# Altium PCB PMP30528_RevA.PcbDoc (part 2 of 3)
Units mil, origin at the board's own origin, x right, y up, seen from the top; angles counter-clockwise.
Board outline 2735.03 x 1328.78 mil, 2 copper layers (Top Layer, Bottom Layer), stack 62 mil thick; 91 components, 42 nets, 252 pads, 63 vias.
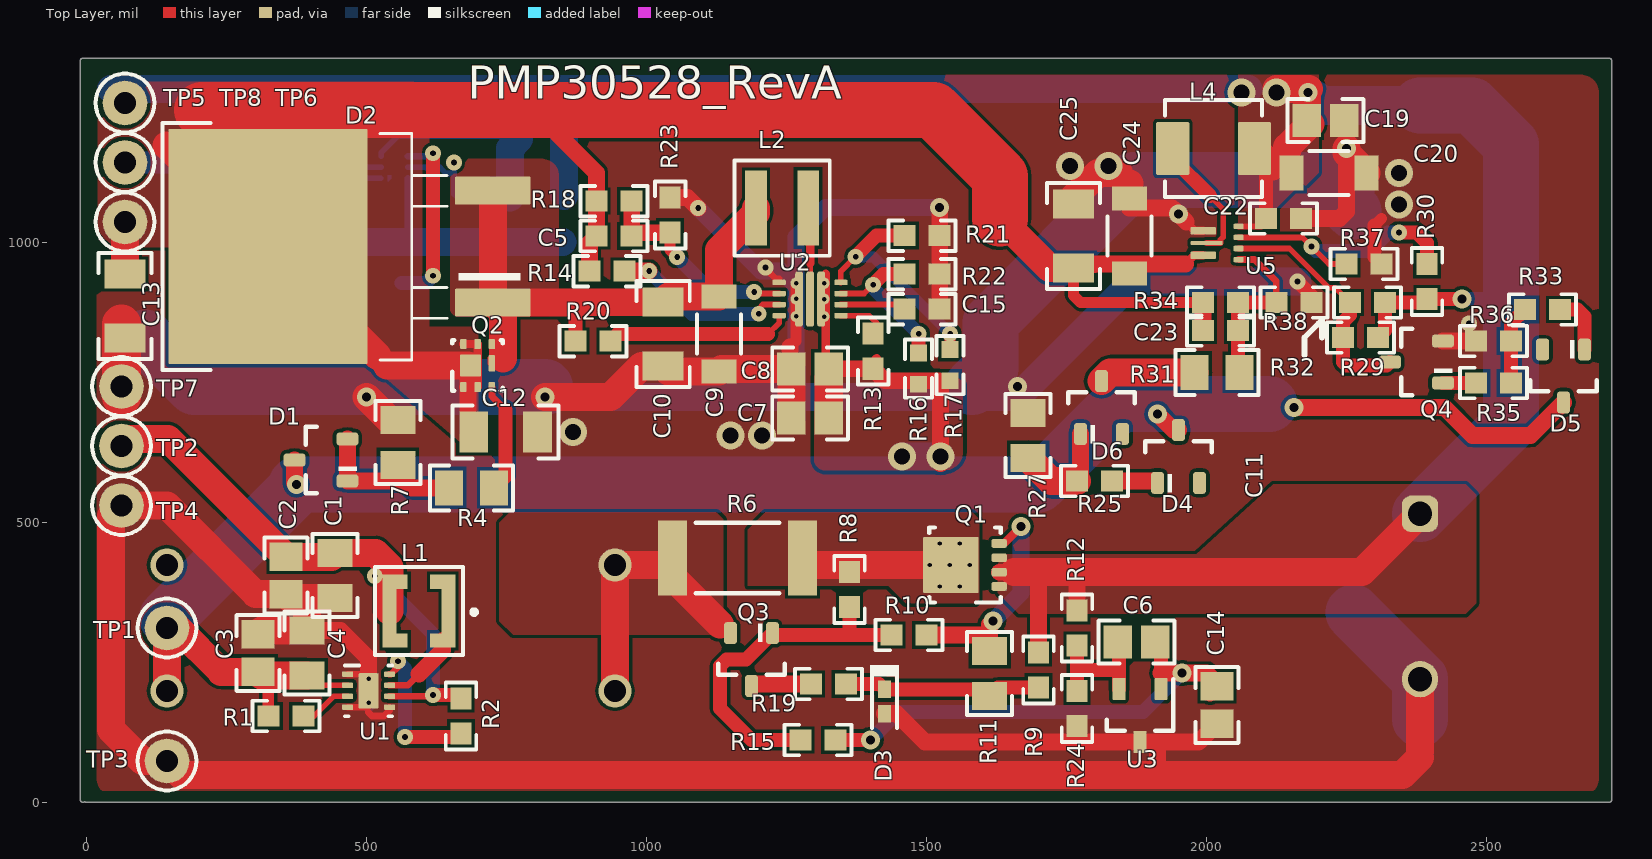
[diagram p0: Top Layer view]

## Part data (continued)
R5: library part PNP300JR-73-47R, "RES, 3 W, 3W Axial resistor", Manufacturer="Yageo America", Power_W=3, Supplier Part Number 1=47AECT-ND, TempCo="300 ppm/C", Tolerance_%=5, Value1=5%, Value2=3W, Value_Code=47R0, ValueDisplayed=47, AEC Category=Q200, AEC Qualified=?, ComponentLink1Description="Datasheet link", ComponentLink1URL=http://www.yageo.com/documents/recent/High%20Power%20Type_PNP.pdf, CompType=Resistor, EIA_Code=E24, LatestRevisionDate=2017-05-10, MountType=TH, PackageReference="3W Axial resistor", PartNumber=DNP, Published=2013-01-08, Publisher="Texas Instruments", Res_ohm=47, RoHS=Y, Supplier 1=Digi-Key, SymbolVersion=2009-05-29, Technology="Metal Element", U/M=EA
R6: "RES, 2.0, 5%, 1 W, AEC-Q200 Grade 0, 2512", Manufacturer=Vishay-Dale, Power_W=1, Supplier Part Number 1=541-2.0XCT-ND, TempCo="200 ppm/C", Tolerance_%=5, Value1=5%, Value2=1W, Value_Code=2R00, ValueDisplayed=2.0, AEC Category=Q200, AEC Grade=0, AEC Qualified=Y, ComponentLink1Description="Datasheet link", ComponentLink1URL=http://www.vishay.com/doc?20035, CompType=Resistor, EIA_Code=E24, LatestRevisionDate=2017-06-11, MountType=SMT, PackageReference=2512, PartNumber=CRCW25122R00JNEG, Published=2008-06-26, Publisher="Texas Instruments", Res_ohm=2, RoHS=Y, SizeArea_mm2=20.16, SizeX_mm=6.3, SizeY_mm=3.2, SizeZ_mm=0.71, Supplier 1=Digi-Key, SymbolVersion=2009-05-29, Technology="Thick Film", U/M=EA, VDC_V=500
R7 R27 R31: "RES, 49.9 k, 1%, 0.125 W, 0805", Manufacturer=Vishay-Dale, Power_W=0.125, Supplier Part Number 1=541-49.9KCCT-ND, TempCo="100 ppm/C", Tolerance_%=1, Value1=1%, Value2=0.125W, Value_Code=49k9, ValueDisplayed=49.9k, AEC Category=Q200, AEC Qualified=?, ComponentLink1Description="Datasheet link", ComponentLink1URL=http://www.vishay.com/docs/20035/dcrcwe3.pdf, CompType=Resistor, EIA_Code=E96, Green_EU RoHS="Passed with Exemption", Green_EU RoHS-2=Passed, Green_Lifecycle=Active, Green_REACh=Passed, LatestRevisionDate=2017-06-23, MountType=SMT, PackageReference=0805, PartNumber=CRCW080549K9FKEA, Published=2008-06-26, Publisher="Texas Instruments", Res_ohm=49900, RoHS=Y, SizeArea_mm2=2.5, SizeX_mm=2, SizeY_mm=1.25, SizeZ_mm=1.45, Supplier 1=Digi-Key, Supplier 2=Newark, Supplier 3=Mouser, Supplier Part Number 2=53K0291, Supplier Part Number 3=71-CRCW0805-49.9K-E3, SymbolVersion=2009-05-29, Technology="Thick Film", U/M=EA, VDC_V=150
R8 R12: "RES, 200, 1%, 0.1 W, 0603", Manufacturer=Vishay-Dale, Power_W=0.1, Supplier Part Number 1=541-200HCT-ND, TempCo="100 ppm/C", Tolerance_%=1, Value1=1%, Value2=0.1W, Value_Code=200R, ValueDisplayed=200, AEC Category=Q200, AEC Qualified=?, ComponentLink1Description="Datasheet link", ComponentLink1URL=http://www.vishay.com/docs/20035/dcrcwe3.pdf, CompType=Resistor, EIA_Code=E96, Green_EU RoHS="Passed with Exemption", Green_EU RoHS-2=Passed, Green_Lifecycle=Active, Green_REACh=Passed, LatestRevisionDate=2017-06-13, MountType=SMT, PackageReference=0603, PartNumber=CRCW0603200RFKEA, Published=2008-06-26, Publisher="Texas Instruments", Res_ohm=200, RoHS=Y, SizeArea_mm2=1.28, SizeX_mm=1.6, SizeY_mm=0.8, SizeZ_mm=1, Supplier 1=Digi-Key, Supplier 2=Newark, Supplier 3=Mouser, Supplier Part Number 2=52K8273, Supplier Part Number 3=71-CRCW0603-200-E3, SymbolVersion=2009-05-29, Technology="Thick Film", U/M=EA, VDC_V=75
R9 R24: "RES, 10.0 k, 1%, 0.1 W, 0603", Manufacturer=Vishay-Dale, Power_W=0.1, Supplier Part Number 1=541-10.0KHCT-ND, TempCo="100 ppm/C", Tolerance_%=1, Value1=1%, Value2=0.1W, Value_Code=10k0, ValueDisplayed=10.0k, AEC Category=Q200, AEC Qualified=?, ComponentLink1Description="Datasheet link", ComponentLink1URL=http://www.vishay.com/docs/20035/dcrcwe3.pdf, CompType=Resistor, EIA_Code=E96, Green_EU RoHS="Passed with Exemption", Green_EU RoHS-2=Passed, Green_Lifecycle=Active, Green_REACh=Passed, LatestRevisionDate=2017-06-13, MountType=SMT, PackageReference=0603, PartNumber=CRCW060310K0FKEA, Published=2008-06-26, Publisher="Texas Instruments", Res_ohm=10000, RoHS=Y, SizeArea_mm2=1.28, SizeX_mm=1.6, SizeY_mm=0.8, SizeZ_mm=1, Supplier 1=Digi-Key, Supplier 2=Newark, Supplier 3=Mouser, Supplier Part Number 2=52K8062, Supplier Part Number 3=71-CRCW0603-10K-E3, SymbolVersion=2009-05-29, Technology="Thick Film", U/M=EA, VDC_V=75
R10 R16 R17 R29 R30 R33 R35 R36: library part Resistor, "RES, xxx ohm, x%, xW, [PackageReference]", Alternate Manufacturer=-, Alternate PartNumber=-, ComponentLink1Description="Datasheet Link", ComponentLink1URL="Paste URL for datasheet here", CompType=Resistor, LatestRevisionDate=2017-05-31, LatestRevisionNote="Added Alternate PartNumber and Alternate Manufacturer parameters to appropriate components.", Manufacturer="Used in BOM report", MountType="SMT or TH (used in PnP report)", PackageReference="Used in PnP output and some BOM reports", PartNumber="Used in BOM report", Publisher="Texas Instruments", RoHS="Used in BOM report.  Use Y or N.", SymbolVersion=2009-05-29, U/M=EA
R15: "RES, 2.00 k, 1%, 0.1 W, 0603", Manufacturer=Vishay-Dale, Power_W=0.1, Supplier Part Number 1=541-2.00KHCT-ND, TempCo="100 ppm/C", Tolerance_%=1, Value1=1%, Value2=0.1W, Value_Code=2k00, ValueDisplayed=2.00k, AEC Category=Q200, AEC Qualified=?, ComponentLink1Description="Datasheet link", ComponentLink1URL=http://www.vishay.com/docs/20035/dcrcwe3.pdf, CompType=Resistor, EIA_Code=E96, Green_EU RoHS="Passed with Exemption", Green_EU RoHS-2=Passed, Green_Lifecycle=Active, Green_REACh=Passed, LatestRevisionDate=2017-06-13, MountType=SMT, PackageReference=0603, PartNumber=CRCW06032K00FKEA, Published=2008-06-26, Publisher="Texas Instruments", Res_ohm=2000, RoHS=Y, SizeArea_mm2=1.28, SizeX_mm=1.6, SizeY_mm=0.8, SizeZ_mm=1, Supplier 1=Digi-Key, Supplier 2=Newark, Supplier 3=Mouser, Supplier Part Number 2=52K8223, Supplier Part Number 3=71-CRCW0603-2.0K-E3, SymbolVersion=2009-05-29, Technology="Thick Film", U/M=EA, VDC_V=75
R18: "RES, 562 k, 1%, 0.1 W, 0603", Manufacturer=Vishay-Dale, Power_W=0.1, Supplier Part Number 1=541-562KHCT-ND, TempCo="100 ppm/C", Tolerance_%=1, Value1=1%, Value2=0.1W, Value_Code=562k, AEC Category=Q200, AEC Qualified=?, ComponentLink1Description="Datasheet link", ComponentLink1URL=http://www.vishay.com/docs/20035/dcrcwe3.pdf, CompType=Resistor, EIA_Code=E96, LatestRevisionDate=2017-06-13, MountType=SMT, PackageReference=0603, PartNumber=CRCW0603562KFKEA, Published=2008-06-26, Publisher="Texas Instruments", Res_ohm=562000, RoHS=Y, SizeArea_mm2=1.28, SizeX_mm=1.6, SizeY_mm=0.8, SizeZ_mm=1, Supplier 1=Digi-Key, Supplier 2=Newark, Supplier 3=Mouser, Supplier Part Number 2=42K3965, Supplier Part Number 3=71-CRCW0603-562K-E3, SymbolVersion=2009-05-29, Technology="Thick Film", U/M=EA, ValueDisplayed=562k, VDC_V=75
R21 R22: "RES, 0, 5%, 0.1 W, 0603", Manufacturer="Yageo America", Power_W=0.1, Supplier Part Number 1=311-0.0GRCT-ND, TempCo="200 ppm/C", Tolerance_%=5, Value1=5%, Value2=0.1W, Value_Code=0000, ValueDisplayed=0, AEC Category=Q200, AEC Qualified=?, ComponentLink1Description="Datasheet link", ComponentLink1URL=http://www.yageo.com/pdf/Pu-RC0603_51_PbFree_L_2.pdf, CompType=Resistor, EIA_Code=E24, Green_EU RoHS="Passed with Exemption", Green_EU RoHS-2=Passed, Green_Lifecycle=Active, Green_REACh=Passed, LatestRevisionDate=2017-06-13, MountType=SMT, PackageReference=0603, PartNumber=RC0603JR-070RL, Published=2008-06-26, Publisher="Texas Instruments", Res_ohm=0, RoHS=Y, SizeArea_mm2=1.28, SizeX_mm=1.6, SizeY_mm=0.8, SizeZ_mm=1, Supplier 1=Digi-Key, Supplier 2=Mouser, Supplier 3=Farnell, Supplier Part Number 2=603-RC0603JR-070RL, Supplier Part Number 3=9233130, SymbolVersion=2009-05-29, Technology="Thick Film", U/M=EA, VDC_V=50
R23: "RES, 150 k, 1%, 0.1 W, 0603", Manufacturer=Vishay-Dale, Power_W=0.1, Supplier Part Number 1=541-150KHCT-ND, TempCo="100 ppm/C", Tolerance_%=1, Value1=1%, Value2=0.1W, Value_Code=150k, AEC Category=Q200, AEC Qualified=?, ComponentLink1Description="Datasheet link", ComponentLink1URL=http://www.vishay.com/docs/20035/dcrcwe3.pdf, CompType=Resistor, EIA_Code=E96, Green_EU RoHS="Passed with Exemption", Green_EU RoHS-2=Passed, Green_Lifecycle=Active, Green_REACh=Passed, LatestRevisionDate=2017-06-13, MountType=SMT, PackageReference=0603, PartNumber=CRCW0603150KFKEA, Published=2008-06-26, Publisher="Texas Instruments", Res_ohm=150000, RoHS=Y, SizeArea_mm2=1.28, SizeX_mm=1.6, SizeY_mm=0.8, SizeZ_mm=1, Supplier 1=Digi-Key, Supplier 2=Newark, Supplier 3=Mouser, Supplier Part Number 2=52K8158, Supplier Part Number 3=71-CRCW0603-150K-E3, SymbolVersion=2009-05-29, Technology="Thick Film", U/M=EA, ValueDisplayed=150k, VDC_V=75
R26: "RES, 390, 5%, 0.125 W, 0805", Manufacturer=Vishay-Dale, Power_W=0.125, Supplier Part Number 1=541-390ACT-ND, TempCo="200 ppm/C", Tolerance_%=5, Value1=5%, Value2=0.125W, Value_Code=390R, ValueDisplayed=390, AEC Category=Q200, AEC Qualified=?, ComponentLink1Description="Datasheet link", ComponentLink1URL=http://www.vishay.com/docs/20035/dcrcwe3.pdf, CompType=Resistor, EIA_Code=E24, LatestRevisionDate=2017-06-23, MountType=SMT, PackageReference=0805, PartNumber=CRCW0805390RJNEA, Published=2008-06-26, Publisher="Texas Instruments", Res_ohm=390, RoHS=Y, SizeArea_mm2=2.5, SizeX_mm=2, SizeY_mm=1.25, SizeZ_mm=1.45, Supplier 1=Digi-Key, Supplier 2=Newark, Supplier 3=Mouser, Supplier Part Number 2=59M6897, Supplier Part Number 3=71-CRCW0805390RJNEA, SymbolVersion=2009-05-29, Technology="Thick Film", U/M=EA, VDC_V=150
R34: "RES, 453 k, 1%, 0.1 W, 0603", Manufacturer=Vishay-Dale, Power_W=0.1, Supplier Part Number 1=541-453KHCT-ND, TempCo="100 ppm/C", Tolerance_%=1, Value1=1%, Value2=0.1W, Value_Code=453k, AEC Category=Q200, AEC Qualified=?, ComponentLink1Description="Datasheet link", ComponentLink1URL=http://www.vishay.com/docs/20035/dcrcwe3.pdf, CompType=Resistor, EIA_Code=E96, LatestRevisionDate=2017-06-13, MountType=SMT, PackageReference=0603, PartNumber=CRCW0603453KFKEA, Published=2008-06-26, Publisher="Texas Instruments", Res_ohm=453000, RoHS=Y, SizeArea_mm2=1.28, SizeX_mm=1.6, SizeY_mm=0.8, SizeZ_mm=1, Supplier 1=Digi-Key, Supplier 2=Newark, Supplier 3=Mouser, Supplier Part Number 2=52K8539, Supplier Part Number 3=71-CRCW0603-453K-E3, SymbolVersion=2009-05-29, Technology="Thick Film", U/M=EA, ValueDisplayed=453k, VDC_V=75
TP1 TP2 TP5 TP6 TP8: "Test Point, Miniature, Red, TH", Color=Red, Manufacturer=Keystone, Supplier Part Number 1=36-5000-ND, ComponentLink1Description="Datasheet URL", ComponentLink1URL=http://www.keyelco.com/userAssets/file/M60-2p60.pdf, CompType="Test Point Loop", ContactFinish=Silver, Green_EU RoHS=Passed, Green_EU RoHS-2=Incomplete, Green_Lifecycle=Active, Green_REACh=Passed, LatestRevisionDate=2017-05-11, MountType=TH, PackageReference="Red Miniature Testpoint", PartNumber=5000, Publisher="Texas Instruments", RoHS=Y, Supplier 1=Digi-Key, Supplier 2=Mouser, Supplier Part Number 2=534-5000, SymbolVersion=2008-04-04
TP3 TP4 TP7: "Test Point, Miniature, Black, TH", Color=Black, Manufacturer=Keystone, Supplier Part Number 1=36-5001-ND, ComponentLink1Description="Datasheet URL", ComponentLink1URL=http://www.keyelco.com/userAssets/file/M60-2p60.pdf, CompType="Test Point Loop", ContactFinish=Silver, Green_EU RoHS=Passed, Green_EU RoHS-2=Incomplete, Green_Lifecycle=Active, Green_REACh=Passed, LatestRevisionDate=2017-05-11, MountType=TH, PackageReference="Black Miniature Testpoint", PartNumber=5001, Publisher="Texas Instruments", RoHS=Y, Supplier 1=Digi-Key, Supplier 2=Mouser, Supplier Part Number 2=534-5001, SymbolVersion=2008-04-04
U1: library part CMP-0037800-2, "Buck Step Down Regulator with 3 to 17 V Input and 5 V Output, -40 to 85 degC, 8-Pin WSON (DSG), Green (RoHS & no Sb/Br)", Manufacturer="Texas Instruments", Rating=Catalog, Switch Current Limit(Typ)(A)=1.05, Code_JEDEC=MO-229, ComponentLink1Description=Datasheet, ComponentLink1URL=http://www.ti.com/general/docs/lit/getliterature.tsp?genericPartNumber=TPS62173&fileType=pdf, ComponentLink2Description="Package Specification", ComponentLink2URL=http://www.ti.com/litv/pdf/mpds308a, ComponentLink3Description="URL Link1", ComponentLink3URL="Samples URL:http://www.ti.com/product/tps54611#samples", DatasheetVersion=SLVSAT8A, Duty Cycle(Max)(%)=100, Eco-Plan="Green (RoHS & no Sb/Br)", Iout(Max)(A)=0.5, Iq(Typ)(mA)=0.017, Mounting Technology="Surface Mount", PackageDescription="8-Pin Plastic Small Outline No-Lead, 2 x 2 x 0.8 mm Body, 0.5 mm Pitch, Exposed Pad", PackageReference=DSG0008A, PackageVersion="revB, Oct-2010", PartNumber=TPS62173DSGT, Preset Vout(V)=5, Regulated Outputs(#)=1, SubFamily="Step-Down Regulator", Synchronous Rectification=TRUE, Topology=Buck, Vin(Max)(V)=17, Vin(Min)(V)=3, Vout(Max)(V)=5, Vout(Min)(V)=5
U2: library part CMP-0079625-1, "1.25-MHz / 2.5-MHz High Accuracy 3-V to 17-V 2-A Step-Down Converter With DCS-Control, RGX0011A (VQFN-HR-11)", Alternate Manufacturer="Texas Instruments", Alternate PartNumber=TPS62147RGXR, AEC Category=Q200, AEC Qualified=N, ComponentLink1Description="Datasheet Link", ComponentLink1URL=http://www.ti.com/lit/ds/symlink/tps62147.pdf, ComponentLink2Description="Product Folder", ComponentLink2URL=http://www.ti.com/product/tps62147, ComponentLink3Description="Online Datasheet", ComponentLink3URL=http://www.ti.com/product/tps62147/datasheet, CompType=IC, Manufacturer="Texas Instruments", MountType=SMT, PackageDescription=VQFN-HR-11, PackageReference=RGX0011A, PartNumber=TPS62147RGXT, SizeArea_mm2=6, SizeAreaWB_mm2=12, SizeX_mm=2, SizeY_mm=3, SizeZ_mm=1
U3: "Adjustable Precision Shunt Regulator, 34 ppm / degC, 100 mA, 0 to 70 degC, 3-pin SOT-23 (DBZ), Green (RoHS & no Sb/Br)", Alternate Manufacturer="Texas Instruments", Alternate PartNumber=Equivalent, Rating=Military, Supplier Part Number 1=TL431CDBZTG4-ND, Temp Coeff(Max)(ppm/ degree C)=92, Temp Coeff(Typ)(ppm/ degree C)=34, Code_JEDEC=TO-236, ComponentLink1Description="Manufacturer URL", ComponentLink1URL=http://www.ti.com/, ComponentLink2Description=Datasheet, ComponentLink2URL=http://www.ti.com/general/docs/lit/getliterature.tsp?genericPartNumber=TL431&fileType=pdf, ComponentLink3Description="Package Specification", ComponentLink3URL=http://www.ti.com/litv/pdf/mpds108a, DatasheetVersion=SLVS543M, Eco-Plan="Green (RoHS & no Sb/Br)", Initial Accuracy @ 25/deg C(%)=2, Iout/Iz(Max)(mA)=100, Manufacturer="Texas Instruments", Min Iz for Regulation(uA)=600, MountType=SMT, PackageDescription="3-Pin Plastic Small Outline, Body 2.92 x 1.3 mm, Pitch 0.95 mm", PackageReference=DBZ0003A, PackageVersion=4203227/B, PartNumber=TL431CDBZTG4, SubFamily="Shunt Voltage Reference", Supplier 1=Digi-Key, Supplier 2=Newark, Supplier 3=Mouser, Supplier Part Number 2=31K7746, Supplier Part Number 3=595-TL431CDBZTG4, VO Adj(Max)(V)=36, VO Adj(Min)(V)=2.495
U4: "Low Input Voltage Synchronous Boost Converter with Integrated LDO/Load Switch, DSE0006A (WSON-6)", Alternate Manufacturer="Texas Instruments", Alternate PartNumber=TPS610981DSET, ComponentLink1Description="Datasheet Link", ComponentLink1URL=http://www.ti.com/lit/ds/symlink/tps610981.pdf, CompType=IC, Green_EU RoHS=Passed, Green_EU RoHS-2=Passed, Green_Lifecycle=Active, Green_REACh=Passed, LatestRevisionDate=2017-05-22, Manufacturer="Texas Instruments", MountType=SMT, PackageDescription=WSON-6, PackageReference=DSE0006A, PartNumber=TPS610981DSER, Publisher="Texas Instruments", RoHS=Y, SizeArea_mm2=2.25, SizeAreaWB_mm2=6.25, SizeX_mm=1.5, SizeY_mm=1.5, SizeZ_mm=0.8, SymbolCreator=Altium, SymbolVersion=2015-06-03, U/M=EA
U5: library part CMP-0078851-2, "8-A Boost Converter with 0.5-V Ultra-Low Input Voltage, RWU0007A (VQFN-HR-7)", Alternate Manufacturer="Texas Instruments", Alternate PartNumber=TPS61022RWUR, AEC Category=Q200, AEC Qualified=N, ComponentLink1Description="Datasheet Link", ComponentLink1URL=http://www.ti.com/lit/ds/symlink/tps61022.pdf, ComponentLink2Description="Product Folder", ComponentLink2URL=http://www.ti.com/product/tps61022, ComponentLink3Description="Online Datasheet", ComponentLink3URL=http://www.ti.com/product/GPN/datasheet, CompType=IC, Manufacturer="Texas Instruments", MountType=SMT, PackageDescription=VQFN-HR-7, PackageReference=RWU0007A, PartNumber=TPS61022RWUT, SizeArea_mm2=4, SizeAreaWB_mm2=9, SizeX_mm=2, SizeY_mm=2, SizeZ_mm=1

## Via types
v1: diameter 28, hole 10, Top Layer to Bottom Layer, 21 vias
v2: diameter 34, hole 16, Top Layer to Bottom Layer, 16 vias
v3: diameter 50, hole 28, Top Layer to Bottom Layer, 11 vias
v4: diameter 19.68, hole 7.87, Top Layer to Bottom Layer, 9 vias
v5: diameter 20, hole 8, Top Layer to Bottom Layer, 6 vias